# EAGLE board Projeto_Relogio_LED (EAGLE 9.6.2)

Size 160 x 100 mm. Coordinates in mm from the lower left corner, seen from the top.
Outline: 0,0 160,0 160,100 0,100 0,0
Copper layers (1*16): Top 0.035mm / dielectric 1.5mm / Bottom 0.035mm
Design rules "default": minimum track width 6mil, minimum drill 0.35mm, track to track 6mil, track to pad 6mil, pad to pad 6mil, via to via 6mil, smd to smd 6mil, copper to edge 40mil, drill to drill 6mil, minimum pad ring 10mil, minimum via ring 8mil, stop-mask expansion 4mil, vias tented up to drill 0mil, thermal gap 10mil

## Footprints (pad centres in the part's own frame; a part is rotated, then mirrored left to right if it is on the bottom)
DO41-10 = drill 1.118: A 5.08,0; C -5.08,0
HLMP6 = drill 0.813 long: A -1.27,0; K 1.27,0
DO41Z10 = drill 1.118: A 5.08,0; C -5.08,0
ACSA56-51SURKWA = smd 3 x 1.9: 1 -10,5.08; 2 -10,2.54; 3 -10,0; 4 -10,-2.54; 5 -10,-5.08; 6 10,-5.08; 7 10,-2.54; 8 10,0; 9 10,2.54; 10 10,5.08
350428-1 = drill 1.8 pad 3.81: 1 -3.175,0; 2 3.175,0
DIL-08 = drill 0.813 long: 1 -3.81,-3.81; 2 -1.27,-3.81; 3 1.27,-3.81; 4 3.81,-3.81; 5 3.81,3.81; 6 1.27,3.81; 7 -1.27,3.81; 8 -3.81,3.81
DIL16 = drill 0.813 long: 1 -8.89,-3.81; 2 -6.35,-3.81; 3 -3.81,-3.81; 4 -1.27,-3.81; 5 1.27,-3.81; 6 3.81,-3.81; 7 6.35,-3.81; 8 8.89,-3.81; 9 8.89,3.81; 10 6.35,3.81; 11 3.81,3.81; 12 1.27,3.81; 13 -1.27,3.81; 14 -3.81,3.81; 15 -6.35,3.81; 16 -8.89,3.81
SO14 = smd 0.66 x 2.032: 1 -3.81,-3.073; 2 -2.54,-3.073; 3 -1.27,-3.073; 4 0,-3.073; 5 1.27,-3.073; 6 2.54,-3.073; 7 3.81,-3.073; 8 3.81,3.073; 9 2.54,3.073; 10 1.27,3.073; 11 0,3.073; 12 -1.27,3.073; 13 -2.54,3.073; 14 -3.81,3.073
SC70-5 = smd 0.4 x 0.7: 1 -0.65,-0.85; 2 0,-0.85; 3 0.65,-0.85; 4 0.65,0.85; 5 -0.65,0.85
B3F-10XX = drill 1.016 long: 1 -3.251,2.261; 2 3.251,2.261; 3 -3.251,-2.261; 4 3.251,-2.261
TO220 = drill 1.118 long: 1 -2.54,-6.35; 2 0,-6.35; 3 2.54,-6.35 | hole 3.302: 0,11.176
U15 = drill 1.422 octagon: 1 -7.5,-6.25; 2 -7.5,6.25; 3 7.5,-6.25; 4 7.5,6.25 | hole 1.8: 6.2,0

## Placement (x,y rotation side)
D1  1N4004  [DO41-10]  -71.12,90.17 0 top  (outside the outline)
D2  1N4004  [DO41-10]  -83.82,90.17 0 top  (outside the outline)
D3  1N4004  [DO41-10]  -19.05,99.06 0 top  (outside the outline)
D4  1N4004  [DO41-10]  -31.75,99.06 0 top  (outside the outline)
D5  HLMP6  [HLMP6]  -22.86,105.41 0 top  (outside the outline)
D6  1N4728  [DO41Z10]  -44.45,99.06 0 top  (outside the outline)
D7  HLMP6  [HLMP6]  -36.83,105.41 0 top  (outside the outline)
D8  HLMP6  [HLMP6]  -50.8,105.41 0 top  (outside the outline)
D9  HLMP6  [HLMP6]  -64.77,105.41 0 top  (outside the outline)
D12  1N4004  [DO41-10]  -57.15,99.06 0 top  (outside the outline)
D13  1N4004  [DO41-10]  -69.85,99.06 0 top  (outside the outline)
D14  1N4004  [DO41-10]  -82.55,99.06 0 top  (outside the outline)
DS1  ACSA56-51SUR  [ACSA56-51SURKWA]  -36.83,10.16 0 top  (outside the outline)
DS2  ACSA56-51SUR  [ACSA56-51SURKWA]  -60.96,10.16 0 top  (outside the outline)
DS3  ACSA56-51SUR  [ACSA56-51SURKWA]  -85.09,10.16 0 top  (outside the outline)
DS4  ACSA56-51SUR  [ACSA56-51SURKWA]  -25.4,34.29 0 top  (outside the outline)
DS5  ACSA56-51SUR  [ACSA56-51SURKWA]  -49.53,34.29 0 top  (outside the outline)
DS6  ACSA56-51SUR  [ACSA56-51SURKWA]  -73.66,34.29 0 top  (outside the outline)
FONTE_AC  350428-1  [350428-1]  -46.99,49.53 0 top  (outside the outline)
IC1  NE555  [DIL-08]  -64.77,81.28 0 top  (outside the outline)
IC2  4056N  [DIL16]  -67.31,50.8 0 top  (outside the outline)
IC3  4056N  [DIL16]  -24.13,69.85 0 top  (outside the outline)
IC4  4056N  [DIL16]  -46.99,69.85 0 top  (outside the outline)
IC5  4056N  [DIL16]  -69.85,69.85 0 top  (outside the outline)
IC6  4056N  [DIL16]  -24.13,81.28 0 top  (outside the outline)
IC7  4056N  [DIL16]  -46.99,81.28 0 top  (outside the outline)
IC8  74HC393D  [SO14]  -19.05,91.44 0 top  (outside the outline)
IC9  74HC393D  [SO14]  -33.02,91.44 0 top  (outside the outline)
IC10  74HC393D  [SO14]  -46.99,91.44 0 top  (outside the outline)
IC11  4081D  [SO14]  -58.42,91.44 0 top  (outside the outline)
IC12  74AHC1G08DCK  [SC70-5]  -93.98,-3.81 0 top  (outside the outline)
IC13  74AHC1G08DCK  [SC70-5]  -93.98,-10.16 0 top  (outside the outline)
IC14  74AHC1G08DCK  [SC70-5]  -93.98,-16.51 0 top  (outside the outline)
IC15  74AHC1G08DCK  [SC70-5]  -93.98,-22.86 0 top  (outside the outline)
IC16  74AHC1G08DCK  [SC70-5]  -93.98,-29.21 0 top  (outside the outline)
S1  [B3F-10XX]  -77.47,78.74 0 top  (outside the outline)
S3  [B3F-10XX]  -87.63,78.74 0 top  (outside the outline)
T1  BD239  [TO220]  -19.05,8.89 0 top  (outside the outline)
TR1  [U15]  -25.4,53.34 0 top  (outside the outline)

## Library data of the parts
D1-D4 D6 D12-D14 = diode
D5 D7-D9 = display-hp; MF: AGILENT TECHNOLOGIES; MPN: HLMP-6500; OC_FARNELL: 1652490; OC_NEWARK: 40K0088
DS1-DS6 = Display_LED; CATEGORY: Display Modules; COLOR: Red; CONFIGURATION: Common Anode; DATASHEET: https://www.kingbrightusa.com/images/catalog/SPEC/ACSA56-51SURKWA.pdf; DESCRIPTION: 0.56" Single Digit Common Anode Red SMD LED Display; DIGIT: 1 Digit; MANUFACTURER: Kingbright; MPN: ACSA56-51SURKWA; OPERATING_TEMPERATURE: -40°C ~ 85°C; PACKAGE_SIZE: 12-SMD No Lead; PACKAGE_TYPE: SMD; PART_STATUS: ACTIVE; ROHS: COMPLIANT; SERIES: ACSA56; SUBCATEGORY: LED Character and Numeric; THERMALLOSS: 0.075 W; TYPE: 7-Segment
FONTE_AC = con-amp
IC1 = st-microelectronics; MF: Arrow Electronics; MPN: NE555N; OC_FARNELL: 1467742; OC_NEWARK: 89K1486
IC2-IC7 IC11 = 40xx
IC8-IC10 = 74xx-eu
IC12-IC16 = 74xx-little-us
S1 S3 = switch-omron; MPN: B3F-1000; OC_FARNELL: 176432; OC_NEWARK: 36M3542
T1 = transistor
TR1 = inductor-neosid; OC_FARNELL: unknown; OC_NEWARK: unknown

## Nets
GND: D2.A D3.A D4.A D4.C D6.A D7.K D9.K DS1.3 DS1.8 DS2.3 DS2.8 DS3.3 DS3.8 DS4.3 DS4.8 DS5.3 DS5.8 DS6.3 DS6.8 FONTE_AC.1 IC1.1 IC2.8 IC3.8 IC4.8 IC5.8 IC6.8 IC7.8 IC8.7 IC9.7 IC10.7 IC12.3 IC13.3 IC14.3 IC15.3 IC16.3 TR1.1 TR1.3
N$1: IC10.1 IC13.4
N$2: IC5.4 IC8.8 IC15.2
N$3: IC8.1 IC15.4
N$4: D1.C D2.C T1.2
N$5: IC1.7
N$6: IC1.2 IC1.6
N$7: D6.C T1.1
N$8: IC1.5
N$9: IC1.3 S3.3
N$21: DS5.7 IC7.9
N$22: DS5.6 IC7.10
N$23: DS5.4 IC7.11
N$24: DS5.2 IC7.12
N$25: DS5.1 IC7.13
N$26: DS5.5 DS5.10 IC7.14
N$27: DS5.9 IC7.15
N$28: DS6.7 IC6.9
N$29: DS6.6 IC6.10
N$30: DS6.4 IC6.11
N$31: DS6.2 IC6.12
N$32: DS6.1 IC6.13
N$33: DS6.5 DS6.10 IC6.14
N$34: DS6.9 IC6.15
N$35: DS3.7 IC5.9
N$36: DS3.6 IC5.10
N$37: DS3.4 IC5.11
N$38: DS3.2 IC5.12
N$39: DS3.1 IC5.13
N$40: DS3.5 DS3.10 IC5.14
N$41: DS3.9 IC5.15
N$42: DS4.7 IC4.9
N$43: DS4.6 IC4.10
N$44: DS4.4 IC4.11
N$45: DS4.2 IC4.12
N$46: DS4.1 IC4.13
N$47: DS4.5 DS4.10 IC4.14
N$48: DS4.9 IC4.15
N$49: DS1.7 IC3.9
N$50: DS1.6 IC3.10
N$51: DS1.4 IC3.11
N$52: DS1.2 IC3.12
N$53: DS1.1 IC3.13
N$54: DS1.5 DS1.10 IC3.14
N$55: DS1.9 IC3.15
N$56: DS2.7 IC2.9
N$57: DS2.6 IC2.10
N$58: DS2.4 IC2.11
N$59: DS2.2 IC2.12
N$60: DS2.1 IC2.13
N$61: DS2.5 DS2.10 IC2.14
N$62: DS2.9 IC2.15
N$63: IC4.4 IC8.6
N$64: IC4.2 IC8.5
N$65: IC4.3 IC8.4 IC16.2
N$66: IC4.5 IC8.3 IC16.1
N$68: IC5.2 IC8.9
N$69: IC5.3 IC8.10
N$70: IC5.5 IC8.11 IC15.1
N$71: IC3.4 IC9.6 IC14.2
N$72: IC3.2 IC9.5
N$73: IC3.3 IC9.4
N$74: IC3.5 IC9.3 IC14.1
N$75: IC2.4 IC9.8 IC13.2
N$76: IC2.2 IC9.9
N$77: IC2.3 IC9.10 IC13.1
N$78: IC2.5 IC9.11
N$79: IC7.4 IC10.6 IC12.2
N$80: IC7.2 IC10.5
N$81: IC7.3 IC10.4 IC12.1
N$82: IC7.5 IC10.3 IC11.2
N$83: IC6.4 IC10.8
N$84: IC6.2 IC10.9
N$85: IC6.3 IC10.10
N$86: IC6.5 IC10.11 IC11.6
N$87: D5.K D7.A
N$88: D8.K D9.A
N$90: D12.A
N$92: IC10.13 IC12.4
N$105: D12.C D13.C D14.C IC8.13
N$107: IC1.4 IC1.8 IC11.1 S1.3 T1.3
N$108: D13.A S1.1
N$109: D14.A S3.1
N$111: IC8.2 IC8.12 IC9.2 IC9.12 IC10.2 IC10.12 IC11.4
N$114: IC9.1 IC16.4
N$117: IC9.13 IC14.4
N$123: IC11.3 IC11.5
VCC: D1.A D3.C FONTE_AC.2 IC2.16 IC3.16 IC4.16 IC5.16 IC6.16 IC7.16 IC8.14 IC9.14 IC10.14 IC12.5 IC13.5 IC14.5 IC15.5 IC16.5 TR1.2 TR1.4
VDD: IC11.14
VEE: IC2.7 IC3.7 IC4.7 IC5.7 IC6.7 IC7.7
VSS: IC11.7

## Tracks (layer width: path | path; a pad name or v marks a point on that pad's centre or on a via)
GND  (36 unrouted)
N$1  (1 unrouted)
N$2  (2 unrouted)
N$3  (1 unrouted)
N$4  (2 unrouted)
N$6  (1 unrouted)
N$7  (1 unrouted)
N$9  (1 unrouted)
N$21  (1 unrouted)
N$22  (1 unrouted)
N$23  (1 unrouted)
N$24  (1 unrouted)
N$25  (1 unrouted)
N$26  (2 unrouted)
N$27  (1 unrouted)
N$28  (1 unrouted)
N$29  (1 unrouted)
N$30  (1 unrouted)
N$31  (1 unrouted)
N$32  (1 unrouted)
N$33  (2 unrouted)
N$34  (1 unrouted)
N$35  (1 unrouted)
N$36  (1 unrouted)
N$37  (1 unrouted)
N$38  (1 unrouted)
N$39  (1 unrouted)
N$40  (2 unrouted)
N$41  (1 unrouted)
N$42  (1 unrouted)
N$43  (1 unrouted)
N$44  (1 unrouted)
N$45  (1 unrouted)
N$46  (1 unrouted)
N$47  (2 unrouted)
N$48  (1 unrouted)
N$49  (1 unrouted)
N$50  (1 unrouted)
N$51  (1 unrouted)
N$52  (1 unrouted)
N$53  (1 unrouted)
N$54  (2 unrouted)
N$55  (1 unrouted)
N$56  (1 unrouted)
N$57  (1 unrouted)
N$58  (1 unrouted)
N$59  (1 unrouted)
N$60  (1 unrouted)
N$61  (2 unrouted)
N$62  (1 unrouted)
N$63  (1 unrouted)
N$64  (1 unrouted)
N$65  (2 unrouted)
N$66  (2 unrouted)
N$68  (1 unrouted)
N$69  (1 unrouted)
N$70  (2 unrouted)
N$71  (2 unrouted)
N$72  (1 unrouted)
N$73  (1 unrouted)
N$74  (2 unrouted)
N$75  (2 unrouted)
N$76  (1 unrouted)
N$77  (2 unrouted)
N$78  (1 unrouted)
N$79  (2 unrouted)
N$80  (1 unrouted)
N$81  (2 unrouted)
N$82  (2 unrouted)
N$83  (1 unrouted)
N$84  (1 unrouted)
N$85  (1 unrouted)
N$86  (2 unrouted)
N$87  (1 unrouted)
N$88  (1 unrouted)
N$92  (1 unrouted)
N$105  (3 unrouted)
N$107  (4 unrouted)
N$108  (1 unrouted)
N$109  (1 unrouted)
N$111  (6 unrouted)
N$114  (1 unrouted)
N$117  (1 unrouted)
N$123  (1 unrouted)
VCC  (18 unrouted)
VEE  (5 unrouted)